# Altium PCB simple.PcbDoc (part 2 of 2)
Units mil, origin at the board's own origin, x right, y up, seen from the top; angles counter-clockwise.
Board outline 3675.59 x 3445.28 mil, 2 copper layers (Top Layer, Bottom Layer); 234 components, 188 nets, 815 pads, 280 vias.
Unrouted connection lines stored in the file: 1.
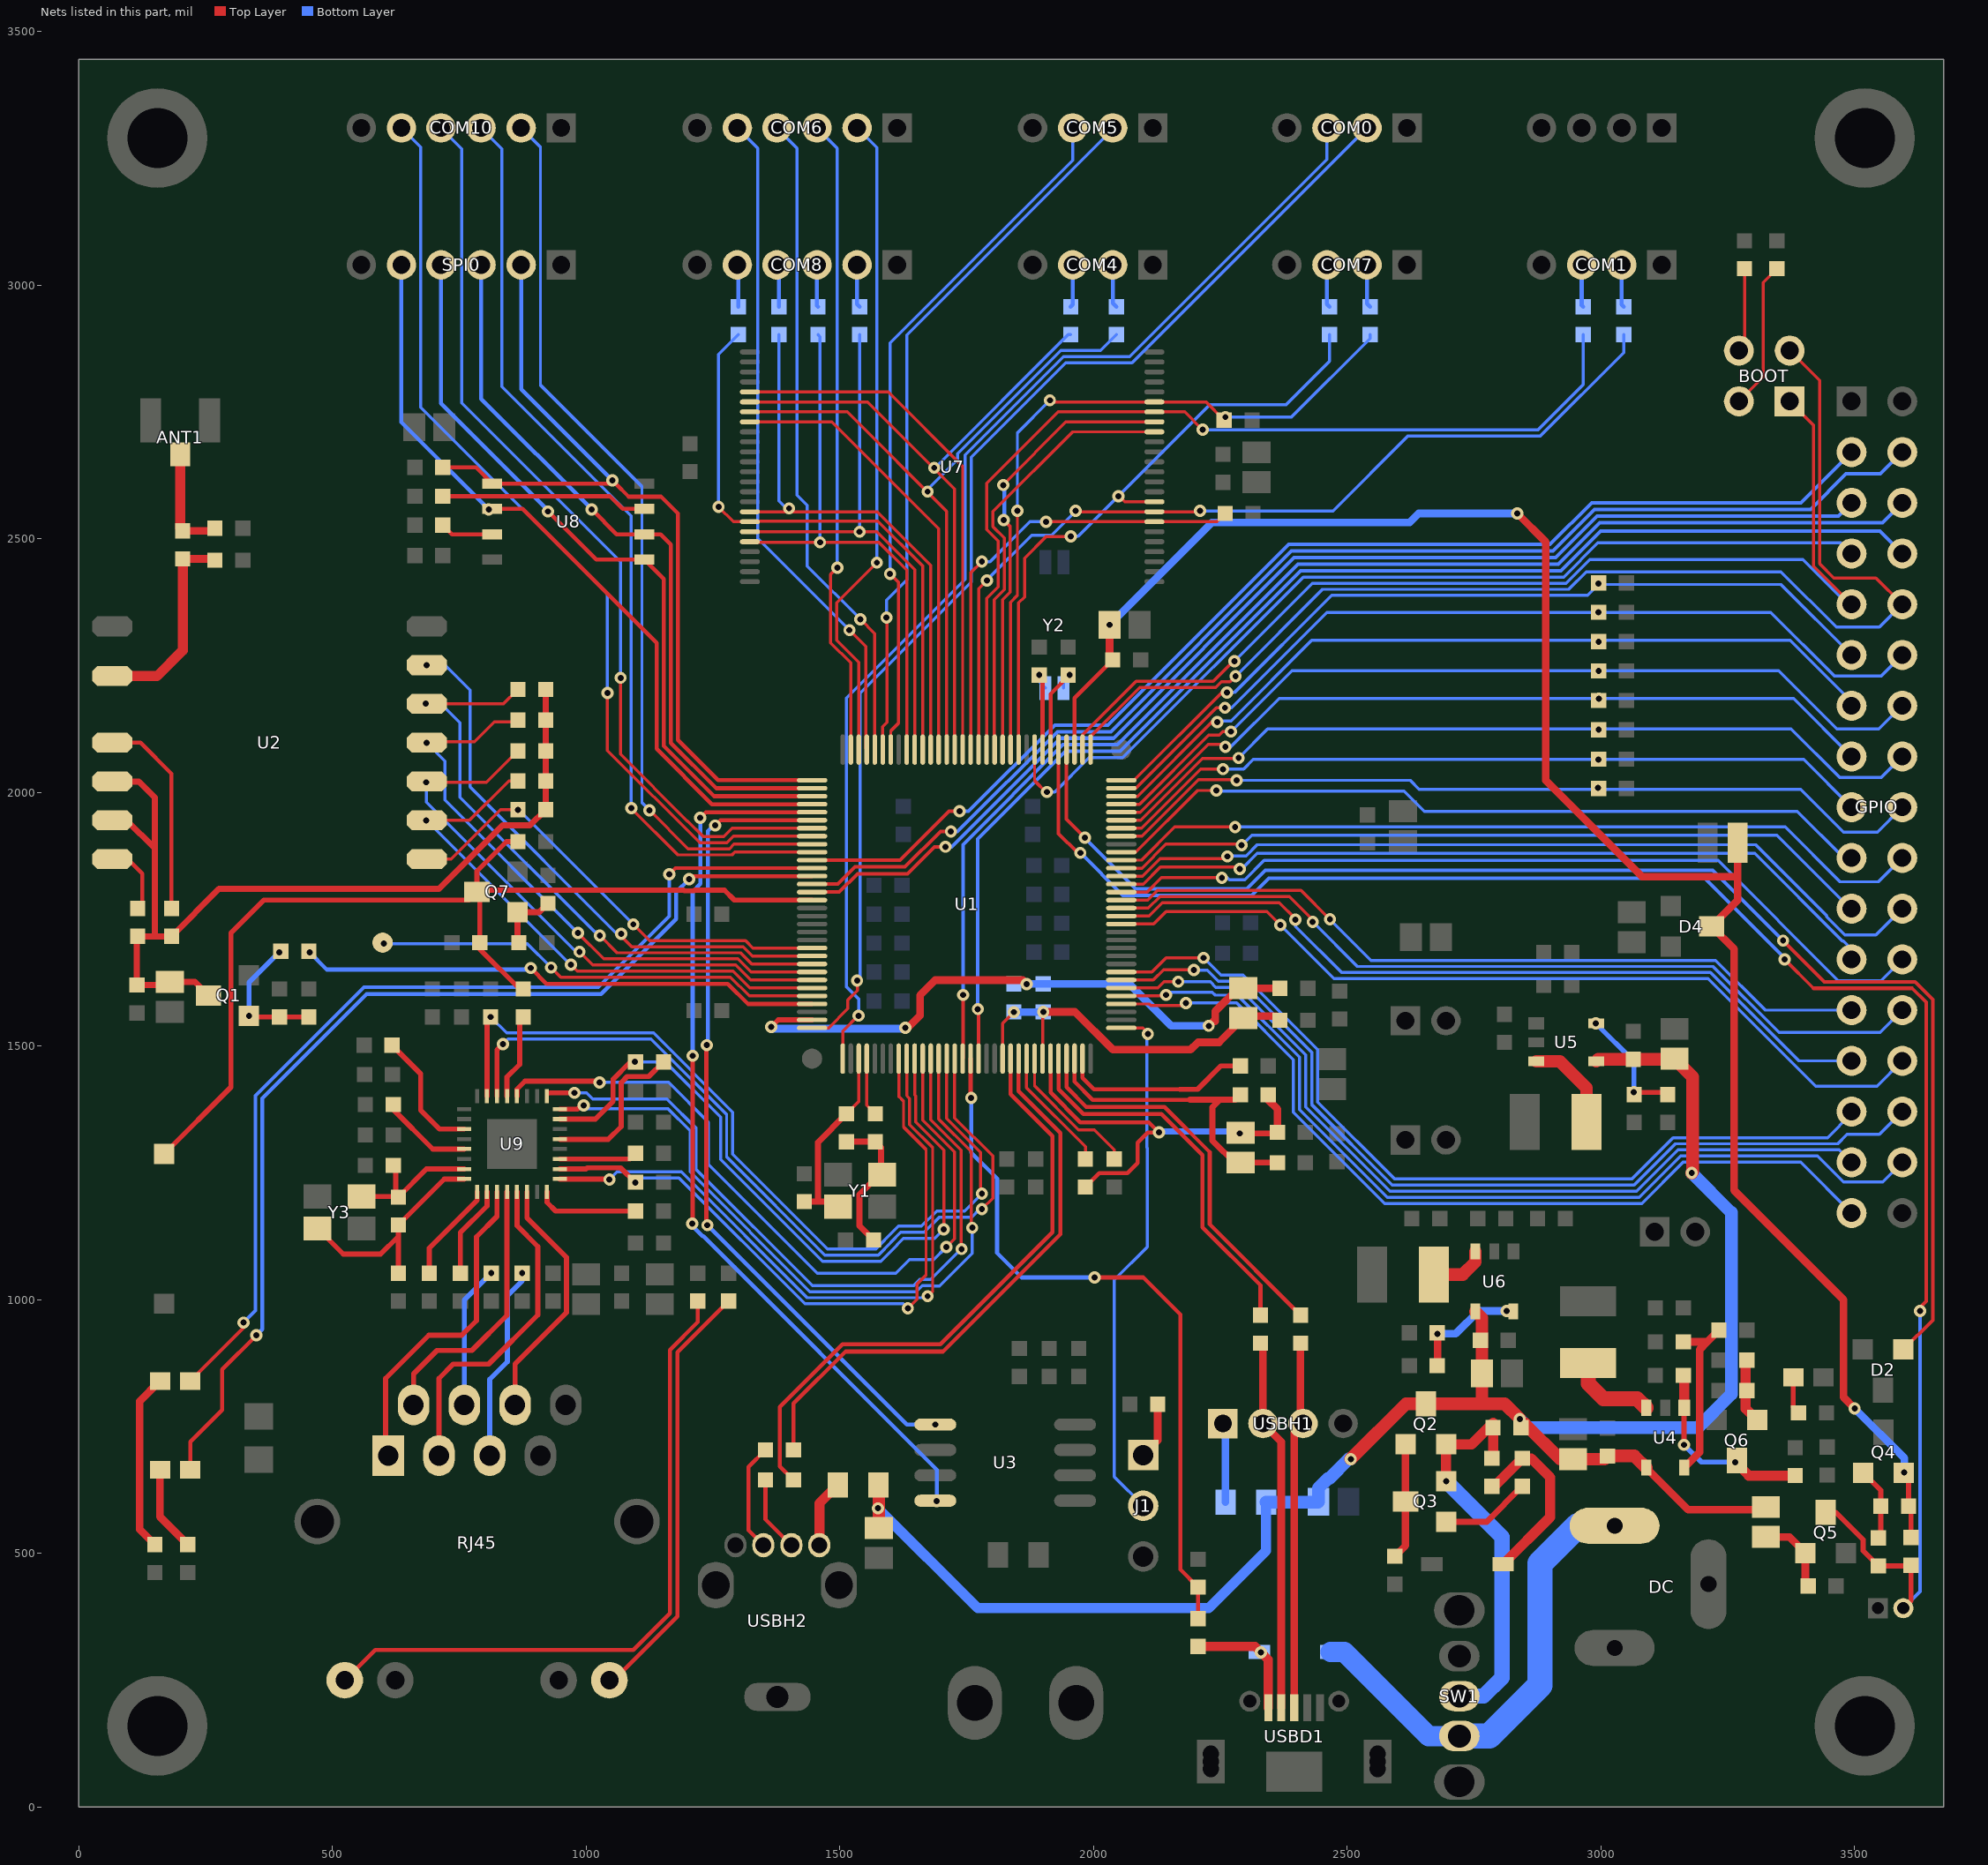
[diagram p2: the nets of this part, all layers, seen from the top]

## Via types
v1: diameter 24, hole 12, Top Layer to Bottom Layer, 232 vias
v2: diameter 25, hole 14, Top Layer to Bottom Layer, 48 vias

## Nets (pads, with @x,y where several pads share a name; then routed paths per layer and width w, separated by ;. In a path a pad name is that pad's centre, name@x,y a point inside that pad or via, vN(x,y) a via of type N, cw(c..) or ccw(c..) an arc to the next point about the centre after c; other vN are vias at no path point) (continued)
NetANT1_1: ANT1.1 C39.1 R18.1 | length 218.9
  Top Layer w15: R18.1@205,2515.5 263,2515.5 C39.1@268.5,2521
  Top Layer w20: ANT1.1@200,2666.53 200,2520.5 R18.1@205,2515.5
NetBOOT_2: BOOT.2 R51.1 | length 292.6
  Top Layer w6: BOOT.2@3272,2771 3320,2819 3320,3005.5 R51.1@3347,3032.5
NetBOOT_4: BOOT.4 R52.1 | length 166.1
  Top Layer w6: BOOT.4@3272,2871 3283,2882 R52.1@3283,3032.5
NetC2_2: C2.2 R1.2 R2.1 Y1.1 | length 287.9
  Top Layer w12: R1.2@1513,1311.5 R2.1@1570,1311.5 1581.33,1300.17 1581.33,1251.5 Y1.1@1584.82,1248.01 ; C2.2@1566.5,1118 1539,1145.5 1539,1207.35 1578.15,1246.5 Y1.1@1583.31,1246.5
NetC37_2: C37.2 Q1.G R5.1 R8.1 | length 269.7
  Top Layer w10: v1(335.68,1560) 338.18,1557.5 C37.2@453.68,1557.5 ; R8.1@397.75,1687.75 R8.1@398.5,1687
  Bottom Layer w10: v1(335.68,1560) 335.68,1625.68 v1(395,1685)
NetC38_1: C38.1 R18.2 U2.9 | length 409
  Top Layer w15: R18.2@200,2460.5 R18.2@200,2464.5 ; R18.2@205,2460.5 266,2460.5 C38.1@268.5,2458
  Top Layer w20: U2.9@66,2229.34 154.34,2229.34 205,2280 R18.2@205,2460.5
NetC42_2: C42.2 Q5.G R34.1 | length 158.3
  Top Layer w15: C42.2@3325,532.47 3371.53,532.47 Q5.G@3403,501 3403,441.5 R34.1@3408.5,436
NetC43_1: C43.1 Q6.B R36.2 | length 127.3
  Top Layer w20: C43.1@3285.5,881 3285.5,785.5 Q6.B@3308,763
NetC44_1: C44.1 Q7.B R41.1 | length 128.3
  Top Layer w12: C44.1@867.5,1704 865,1706.5 Q7.B@865,1764 907.5,1764 R41.1@925,1781.5
NetC64_2: C64.2 U9.29 | length 181.8
  Top Layer w10: C64.2@620,1385 620,1375 697.84,1297.16 U9.29@759.51,1297.16
NetC65_2: C65.2 U9.2 | length 181.9
  Top Layer w10: C65.2@752,1052.5 752,1132.2 804.79,1184.99 U9.2@804.79,1212.51
NetC66_2: C66.2 RJ45.4 | length 281.5
  Bottom Layer w10: RJ45.4@760,792.91 760,999.5 v1(813,1052.5)
NetC67_2: C67.2 RJ45.5 | length 386.1
  Bottom Layer w10: RJ45.5@810,692.91 810,843 845,878 845,1008 874,1037 v1(874,1052.5)
NetC68_1: C68.1 R90.2 U9.31 Y3.1 | length 287
  Top Layer w10: Y3.1@557.31,1203.5 R90.2@625,1203.5 ; C68.1@625,1265 R90.2@625,1203.5 ; U9.31@759.51,1257.79 685.29,1257.79 R90.2@630,1202.5 629,1203.5 R90.2@625,1203.5
NetC69_1: C69.1 R90.1 U9.32 Y3.3 | length 456.8
  Top Layer w10: Y3.3@470.69,1140.5 521.2,1090 595,1090 630,1125 ; C69.1@630,1052.5 630,1125 ; U9.32@759.51,1238.1 720.6,1238.1 R90.1@630,1147.5 630,1125
NetCK1_1: CK1.1 U4.3 | length 174
  Top Layer w30: CK1.1@2975,874.98 2975,835 3005,805 3071.31,805 U4.3@3089.2,787.11
NetCK2_1: CK2.1 U5.3 | length 187.7
  Top Layer w25: U5.3@2872.69,1470.13 2918.87,1470.13 2971.71,1417.29 CK2.1@2971.71,1350.53
NetCK3_1: CK3.1 U6.3 | length 112.2
  Top Layer w25: CK3.1@2671.02,1050 2728,1050 2752.6,1074.6 U6.3@2752.6,1095
NetD1_2: D1.2 R10.1 USBD1.1 | length 243.8
  Top Layer w18: R10.1@2206,316.5 2318.5,316.5 v1(2330,305) 2344.45,290.55 USBD1.1@2344.45,195.92
NetD3_1: D3.1 R28.1 R29.2 | length 362.7
  Top Layer w20: R28.1@2785,632.5 2790,632.5 R29.2@2845,687.5 2862.5,687.5 2900,650 2900,571.63 D3.1@2807.37,479
NetFS1_2: FS1.2 USBH1.1 | length 157.1
  Bottom Layer w15: USBH1.1@2255,756 2260,751 FS1.2@2260,601
NetFS2_2: FS2.2 USBH2.1 | length 133.7
  Top Layer w20: USBH2.1@1459.68,516.32 1459.68,598.68 FS2.2@1496,635
NetJ1_1: J1.1 R6.1 | length 111.8
  Top Layer w15: J1.1@2098,694 2126.5,722.5 R6.1@2126.5,794
NetNET_1: NET.1 R7.1 | length 170.2
  Top Layer w15: NET.1@160.08,665 160.08,572.42 R7.1@215,517.5
NetPW1_2: PW1.2 R44.2 | length 74.3
  Top Layer w10: PW1.2@3379.08,847 3379.08,787.42 R44.2@3389.5,777
NetQ2_G: Q2.G Q3.D R31.2 | length 229.2
  Top Layer w15: R31.2@2594,494.5 2615,515.5 Q3.D@2615,602.5 Q2.G@2615,715
NetQ2_S: Q2.S Q3.S R27.2 R28.2 SW1.2 | length 776.2
  Top Layer w20: v1(2695,642.5) Q2.S@2695,715 2745,715 R27.2@2787.5,757.5 ; R28.2@2785,687.5 2787.5,690 R27.2@2787.5,748
  Bottom Layer w30: v1(2695,642.5) 2805,532.5 2805,255 2768.8,218.8 SW1.2@2721,218.8
NetQ3_G: Q3.G R29.1 | length 179
  Top Layer w12: Q3.G@2695,562.5 2775,562.5 R29.1@2845,632.5
NetQ4_B: Q4.B R32.2 R35.2 | length 144.7
  Top Layer w10: Q4.B@3517,659 3551.5,624.5 R32.2@3551.5,593 3551.5,535 R35.2@3547,530.5
NetQ6_C: Q6.C R37.1 R43.2 U4.1 | length 381.7
  Top Layer w10: v1(3164,714) U4.1@3164,787.11
  Top Layer w20: R43.2@3162.5,851 3164,849.5 U4.1@3164,787.11 ; v1(3265,680) 3291.5,653.5 R37.1@3383,653.5
  Bottom Layer w10: v1(3164,714) 3198,680 v1(3265,680)
NetR3_1: R3.1 U1.127 | length 377.3
  Top Layer w8: U1.127@1978.35,1475.35 1978.35,1437.65 2001,1415 2170,1415
  Top Layer w10: 2170,1415 2205,1415 2251,1461 R3.1@2289.5,1461
NetR4_1: R4.1 U1.121 | length 281.3
  Top Layer w6: U1.121@1883.86,1475.35 1883.86,1421.76 1970.62,1335 2002,1335 2041,1296 R4.1@2041,1277.5
NetR11_2: R11.2 U2.13 | length 143.1
  Top Layer w8: U2.13@66,1868.73 96.27,1868.73 125,1840 125,1780.5 R11.2@116,1771.5
NetR14_2: R14.2 U2.10 | length 407.8
  Top Layer w8: U2.10@66,2098.09 121.91,2098.09 183,2037 R14.2@183,1771.5
NetR21_1: R21.1 USBH2.2 | length 153.3
  Top Layer w8: R21.1@1353.5,645 1353.5,567.38 USBH2.2@1404.56,516.32 USBH2.2@1407,518.76
NetR22_1: R22.1 USBH2.3 | length 213.7
  Top Layer w8: USBH2.3@1349.44,516.32 1320,545.76 1320,670.5 R22.1@1353.5,704
NetR42_2: R42.2 R45.1 U4.5 | length 346.4
  Top Layer w15: R42.2@3162.5,917 3209.5,917 ; U4.5@3164,669 3194.5,699.5 3194.5,902 3209.5,917 ; R45.1@3232.5,940 3209.5,917
NetR46_1: R46.1 R47.2 U5.5 | length 235.6
  Top Layer w10: v1(3065,1409) 3127.21,1409 R47.2@3131.69,1404.53
  Bottom Layer w10: v1(2990,1545) 3065,1470 v1(3065,1409)
NetR48_1: R48.1 R49.2 U6.5 | length 231.7
  Top Layer w15: R49.2@2677.5,870 2678,870.5 v1(2678,933) ; v1(2814,978) 2826.29,978 U6.5@2827.4,976.89
  Bottom Layer w15: v1(2678,933) 2714,933 2759,978 v1(2814,978)
NetR82_1: R82.1 SYS.1 | length 351.5
  Top Layer w15: R82.1@150,517.5 120,547.5 120,799.92 SYS.1@160.08,840
NetR85_2: R85.2 RJ45.9 | length 1333.6
  Top Layer w8: RJ45.9@524.37,250 584.37,310 1093,310 1165,382 1165,901.3 1220,956.3 R85.2@1220,997.5
NetR86_2: R86.2 RJ45.12 | length 849.5
  Top Layer w8: RJ45.12@1046,250 1054,250 1180,376 1180,896.5 R86.2@1281,997.5
NetR87_2: R87.2 U9.13 | length 318.5
  Top Layer w10: U9.13@948.49,1316.84 949.33,1316 1043.53,1316 1069,1341.47 1069,1428.06 1080.94,1440 1123.5,1440 R87.2@1152.5,1469
NetR88_1: R88.1 U9.27 | length 252.7
  Top Layer w10: R88.1@617.5,1502 674,1445.5 674,1373.53 711,1336.53 U9.27@759.51,1336.53
NetR91_2: R91.2 U9.1 | length 199
  Top Layer w10: R91.2@691,1052.5 691,1102 785.1,1196.1 U9.1@785.1,1212.51
NRST: C45.2 Q7.C R38.2 R89.1 RESET.2 U1.80 | length 2048.8
  Top Layer w10: RESET.2@168.3,1287.39 300,1419.1 300,1723 365,1788 769,1788 Q7.C@785,1804 Q7.C@785,1807.5 ; Q7.C@786,1803 790.5,1798.5 R38.2@790.5,1704 790.5,1691 R89.1@869,1612.5 ; C45.2@865.5,1903 843,1903 785,1845 Q7.C@785,1807.5 ; U1.80@1445.35,1787.87 1292.13,1787.87 1272.5,1807.5 1214.03,1807.5 1212.53,1806 1193.47,1806 1191.97,1807.5 Q7.C@785,1807.5
PA0: BOOT.1 GPIO.9 U1.34 | length 2174.6
  Top Layer w6: U1.34@1978.35,2084.65 1978.35,2113.49 2083.86,2219 2236.03,2219 2276.03,2259 v1(2278,2259) ; BOOT.1@3372,2771 3419,2724 3419,2446 GPIO.9@3494,2371
  Bottom Layer w6: v1(2278,2259) 2431.5,2412.5 2931.53,2412.5 2978.03,2459 3398,2459 3486,2371 GPIO.9@3494,2371
PA1: BOOT.3 GPIO.10 U1.33 | length 2464.3
  Top Layer w6: U1.33@1994.11,2084.66 1994.11,2110.08 2091,2207 2241,2207 2252,2218 2269,2218 v1(2280,2229) ; BOOT.3@3372,2871 3431,2812 3431,2450.97 3458.97,2423 3542,2423 GPIO.10@3594,2371
  Bottom Layer w6: v1(2280,2229) 2451.5,2400.5 2936.5,2400.5 2971,2435 3355,2435 3464,2326 3549,2326 GPIO.10@3594,2371
PA2: GPIO.11 R53.1 U1.32 | length 1658
  Top Layer w6: U1.32@2054.65,2024.09 2080.09,2024.09 2253,2197 v1(2263,2197) ; v1(2995,2412) 2995,2412.5 R53.1@2995.5,2413
  Bottom Layer w6: v1(2263,2197) 2277.7,2197 2469.2,2388.5 2973.5,2388.5 2995,2410 3355,2410 GPIO.11@3494,2271
PA3: GPIO.12 R54.1 U1.31 | length 1752.3
  Top Layer w6: U1.31@2054.65,2008.35 2083.49,2008.35 2242.14,2167 v1(2259,2167) ; v1(2995.14,2355.14) R54.1@2995.5,2355.14
  Bottom Layer w6: v1(2259,2167) 2272,2167 2460,2355 v1@2995,2355 ; v1(2995.14,2355.14) v1@2995,2355 ; GPIO.12@3594,2271 3553,2230 3460,2230 3335,2355 v1@2995,2355
PA4: GPIO.13 R55.1 U1.30 | length 1618.1
  Top Layer w6: U1.30@2054.65,1992.6 2086.6,1992.6 v1@2236,2142
  Bottom Layer w6: v1(2244,2139) 2246,2141 2271,2141 2430,2300 3373.03,2300 3494,2179.03 GPIO.13@3494,2171
  other v1: 2995.5,2297.29
PA5: GPIO.14 R56.1 U1.29 | length 1715
  Top Layer w6: U1.29@2054.65,1976.85 2090.85,1976.85 2227,2113 2247.7,2113 2254.7,2120 v1(2271,2120)
  Bottom Layer w6: v1(2271,2120) 2391,2240 3350,2240 3465,2125 3548,2125 GPIO.14@3594,2171
  other v1: 2995.5,2239.43
PA6: GPIO.15 R57.1 U1.28 | length 1586.4
  Top Layer w6: U1.28@2054.65,1961.1 2092.07,1961.1 2225.97,2095 2260,2095 v1(2260,2090)
  Bottom Layer w6: v1(2260,2090) 2270.7,2090 2365.7,2185 v1(2996,2185) 3380,2185 GPIO.15@3494,2071
PA7: GPIO.16 R58.1 U1.27 | length 1670.1
  Top Layer w6: U1.27@2054.65,1945.35 2093.3,1945.35 2214.94,2067 2285,2067 v1(2286,2068)
  Bottom Layer w6: v1(2286,2068) 2343,2125 3375,2125 3470,2030 3553,2030 GPIO.16@3594,2071
  other v1: 2995.5,2123.71
PA8: GPIO.17 R59.1 U1.26 | length 1534.4
  Top Layer w6: U1.26@2054.65,1929.61 2094.52,1929.61 2210.91,2046 v1(2255,2046)
  Bottom Layer w6: v1(2255,2046) 2296,2046 2315,2065 v1(2995,2065) 3400,2065 GPIO.17@3494,1971
PA9: GPIO.18 R60.1 U1.25 | length 1649.8
  Top Layer w6: U1.25@2054.65,1913.86 2095.74,1913.86 2206.88,2025 2281,2025 v1(2282,2024) ; v1(2994.5,2009) R60.1@2995.5,2008
  Bottom Layer w6: v1(2282,2024) 2624,2024 2642,2006 3394,2006 3478,1922 3545,1922 GPIO.18@3594,1971
PA10: GPIO.19 U1.23 | length 1544.8
  Top Layer w6: U1.23@2054.65,1882.36 2083.49,1882.36 2205.13,2004 v1(2242,2004)
  Bottom Layer w6: v1(2242,2004) 2243,2003 2612,2003 2652,1963 3387,1963 3479,1871 GPIO.19@3494,1871
PA11: GPIO.20 U1.22 | length 1630.6
  Top Layer w6: U1.22@2054.65,1866.61 2094.38,1866.61 2159.76,1932 v1(2279,1932)
  Bottom Layer w6: v1(2279,1932) 3363,1932 3471,1824 3547,1824 GPIO.20@3594,1871
PA12: GPIO.21 U1.21 | length 1529
  Top Layer w6: U1.21@2054.65,1850.87 2095.6,1850.87 2142.87,1898.13 2289.87,1898.13 v1(2292,1896)
  Bottom Layer w6: v1(2292,1896) 2312,1916 3347,1916 3493,1770 GPIO.21@3494,1771
PA13: GPIO.22 U1.20 | length 1661.4
  Top Layer w6: U1.20@2054.65,1835.12 2096.82,1835.12 2131.35,1869.65 2259.65,1869.65 v1(2264,1874)
  Bottom Layer w6: v1(2264,1874) 2265,1875 2300.7,1875 2322.7,1897 3304.97,1897 3445,1756.97 3445,1755 3481,1719 3542,1719 GPIO.22@3594,1771
PA14: GPIO.23 U1.19 | length 1566.1
  Top Layer w6: U1.19@2054.65,1819.37 2098.05,1819.37 2131.68,1853 2284,1853 v1(2288,1849)
  Bottom Layer w6: v1(2288,1849) 2291.67,1849 2322.67,1880 3303.03,1880 3476.03,1707 3478,1707 3494,1691 GPIO.23@3494,1671
PA15: GPIO.24 U1.18 | length 1685.7
  Top Layer w6: U1.18@2054.65,1803.62 2105.62,1803.62 2134,1832 v1(2253,1832)
  Bottom Layer w6: v1(2253,1832) 2260,1832 2262,1834 2268,1828 2298,1828 2336,1866 3231,1866 3468,1629 3552,1629 GPIO.24@3594,1671
PB0: COM5.3 U1.58 | length 1388
  Top Layer w6: v1(1599,2431) 1616,2414 1616,2137 1600.39,2121.39 U1.58@1600.39,2084.65
  Bottom Layer w6: v1(1599,2431) 1599,2886 1959,3246 COM5.3@1959,3310
PB1: COM5.2 U1.59 | length 1414
  Top Layer w6: U1.59@1584.65,2084.65 1584.65,2129.65 1593,2138 1593,2344 v1(1592,2345)
  Bottom Layer w6: v1(1592,2345) 1592,2379 1632,2419 1632,2902 2038,3308 COM5.2@2038,3310
PB2: COM6.4 U1.60 | length 1305.3
  Top Layer w6: v1(1540.5,2341.5) 1568.9,2313.1 U1.60@1568.9,2084.65
  Bottom Layer w6: COM6.4@1376,3310 1416,3270 1416,2586 1436,2566 1436,2446 v1(1540.5,2341.5)
PB3: COM6.5 U1.61 | length 1331
  Top Layer w6: v1(1519,2320) 1551,2288 1551,2086.8 U1.61@1553.15,2084.65
  Bottom Layer w6: COM6.5@1298,3310 1338,3270 1338,2501 v1(1519,2320)
PB4: COM6.2 U1.62 | length 1292.2
  Top Layer w6: U1.62@1537.4,2084.65 1537.4,2256.6 1494,2300 1494,2374 v1(1573,2453)
  Bottom Layer w6: COM6.2@1534,3310 1573,3271 v1(1573,2453)
PB5: COM6.3 U1.63 | length 1263.7
  Top Layer w6: v1(1495,2443) 1482,2430 1482,2295.03 1521.65,2255.38 U1.63@1521.65,2084.65
  Bottom Layer w6: COM6.3@1455,3310 1495,3270 v1(1495,2443)
PB6: R68.1 SPI0.2 U1.65 U8.1 | length 1744.6
  Top Layer w8: R68.1@717.5,2641 783,2641 U8.1@815,2609 1058,2609 1084,2583 1148,2583 1181,2550 1181,2103.4 1260.3,2024.09 U1.65@1445.35,2024.09
  Bottom Layer w8: SPI0.2@872,3040 872,2795 v1(1052,2615)
PB7: SPI0.3 U1.66 U8.6 | length 1463.6
  Top Layer w8: v1(1011,2558) 1060,2509 U8.6@1115,2509 1147,2509 1167,2489 1167,2097.6 1256.25,2008.35 U1.66@1445.35,2008.35
  Bottom Layer w8: SPI0.3@793,3040 793,2776 v1(1011,2558)
PB8: SPI0.4 U1.67 U8.5 | length 1518.5
  Top Layer w8: v1(925,2554) 1020,2459 U8.5@1115,2459 1153,2421 1153,2091.8 1252.2,1992.6 U1.67@1445.35,1992.6
  Bottom Layer w8: SPI0.4@714,3040 714,2767.2 v1@926.1,2555.1
PB9: SPI0.5 U1.68 U8.2 | length 1554.6
  Top Layer w8: v1(808,2558) 814,2558 U8.2@815,2559 875,2559 1139,2295 1139,2086 1248.15,1976.85 U1.68@1445.35,1976.85
  Bottom Layer w8: SPI0.5@636,3040 636,2730 v1(808,2558)
PB10: U1.69 U3.4 | length 1773.9
  Top Layer w8: v1(1209,1150) 1210,1151 v1@1210,1476 ; v1(1225,1950) 1236.1,1961.1 U1.69@1445.35,1961.1
  Bottom Layer w8: v1(1209,1150) 1209,1145.89 1229.89,1125 1231,1125 1691,665 v1(1691,603) ; v1(1210,1481) 1210,1804.89 1225,1819.89 v1(1225,1950)
PB11: U1.70 U3.1 | length 1604.8
  Top Layer w8: v1@1237,1502 1237,1149 v1(1239,1147) ; v1(1254.5,1935) 1264.85,1945.35 U1.70@1445.35,1945.35
  Bottom Layer w8: v1(1238,1502) 1240,1504 1240,1924 1251,1935 v1(1254.5,1935) ; v1(1239,1147) 1632,754 v1(1688.2,754)
PB12: COM10.4 U1.71 | length 1832.7
  Top Layer w6: v1(1068,2226) 1068,2075.38 1199.5,1943.89 1200,1943.89 1230.89,1913 1271.11,1913 1287.72,1929.61 U1.71@1445.35,1929.61
  Bottom Layer w6: COM10.4@714,3310 755,3269 755,2768 1068,2455 v1(1068,2226)
PB13: COM10.5 U1.72 | length 1879.2
  Top Layer w6: v1(1042,2196) 1042,2083 1224,1901 1277.5,1901 1290.36,1913.86 U1.72@1445.35,1913.86
  Bottom Layer w6: COM10.5@636,3310 674,3272 674,2759 1042,2391 v1(1042,2196)
PB14: COM10.2 U1.73 | length 1805.4
  Top Layer w6: v1(1125,1965) 1201,1889 1282.47,1889 1291.58,1898.11 U1.73@1445.35,1898.11
  Bottom Layer w6: COM10.2@872,3310 910,3272 910,2803 1110,2603 1110,1980 v1(1125,1965)
PB15: COM10.3 U1.74 | length 1860.3
  Top Layer w6: v1(1089,1969) 1181,1877 1287.44,1877 1292.8,1882.36 U1.74@1445.35,1882.36
  Bottom Layer w6: COM10.3@793,3310 834,3269 834,2800 1089,2545 v1(1089,1969)
PD0: R20.1 U1.86 U2.1 | length 912.6
  Top Layer w6: U2.1@686,1868.73 733.73,1868.73 831,1966 v1(865.5,1966) ; v1(1093,1740) 1125,1708 1314.36,1708 1328.97,1693.39 U1.86@1445.35,1693.39
  Bottom Layer w6: v1(865.5,1966) 867,1966 v1(1093,1740)
PD1: U1.87 U2.6 | length 1121.5
  Top Layer w6: v1(1069,1721.57) 1069,1717 1090,1696 1309.39,1696 1327.75,1677.64 U1.87@1445.35,1677.64
  Bottom Layer w6: v1(686,2251) 687,2252 721,2252 771,2202 771,2011 1066,1716 1070,1716 1069,1717 v1(1069,1721.57)
PD2: R12.1 U1.88 U2.5 | length 1251.3
  Top Layer w6: U2.5@686,2174.55 837.05,2174.55 R12.1@865.5,2203 ; v1(1027,1718) 1061,1684 1304.42,1684 1326.53,1661.89 U1.88@1445.35,1661.89
  Bottom Layer w6: v1(684,2175) 714,2175 751.49,2137.51 751.49,1990.49 1016.97,1725 1020,1725 v1(1027,1718)
PD3: R13.1 U1.89 U2.4 | length 1189.6
  Top Layer w6: v1(686,2098.09) 687.91,2100 780,2100 819.26,2139.26 862.26,2139.26 R13.1@865.5,2142.5 ; v1(984,1723) 1035,1672 1299.45,1672 1325.3,1646.14 U1.89@1445.35,1646.14
  Bottom Layer w6: v1(686,2098.09) 722,2062.09 722,1985 v1(984,1723)
PD4: R15.1 U1.90 U2.3 | length 1150.8
  Top Layer w6: v1(685,2020) 803.5,2020 R15.1@865.5,2082 ; v1(987,1686) 1013,1660 1294.48,1660 1324.08,1630.39 U1.90@1445.35,1630.39
  Bottom Layer w6: v1(685,2020) 685,1981 980,1686 v1(987,1686)
PD5: R17.1 U1.91 U2.2 | length 1109.6
  Top Layer w6: v1(685,1945) 770,1945 847.5,2022.5 R17.1@865.5,2022.5 ; v1(970,1660.57) 982.57,1648 1289.5,1648 1322.86,1614.65 U1.91@1445.35,1614.65
  Bottom Layer w6: v1(685,1945) v1@969.71,1660.29
PD6: PD6.1 U1.92 | length 887.1
  Top Layer w6: v1(931,1655) 950,1636 1284.53,1636 1321.64,1598.9 U1.92@1445.35,1598.9
  Bottom Layer w6: v1(601,1702) 884,1702 v1(931,1655)
PD7: R8.2 U1.93 | length 1035.3
  Top Layer w8: R8.2@453.5,1687 R8.2@455,1687 ; v1(891,1654) 922,1623 1279.15,1623 1319,1583.15 U1.93@1445.35,1583.15
  Bottom Layer w8: v1(455,1685) 489,1651 v1@891,1651
PE0: COM0.3 U1.97 | length 2331
  Top Layer w6: U1.97@1505.91,1475.35 1505.91,1529.91 v1@1537,1561 ; v1(1537,1560) v1@1537,1561 ; v1@1539,1563 v1@1537,1561
  Bottom Layer w6: v1(1537,1560) 1537,1593 1513,1617 1513,2185.97 1747,2419.97 1747,2665.53 1940.51,2859.04 2071.07,2859.04 2460,3247.97 COM0.3@2460,3310
PE1: COM0.2 U1.96 | length 2323.5
  Top Layer w6: U1.96@1445.35,1535.91 1477.91,1535.91 1516,1574 1516,1591 1535,1610 1535,1628 v1(1534,1629)
  Bottom Layer w6: v1(1534,1629) 1540,1635 1540,2196 1759,2415 1759,2660.56 1945.49,2847.04 2076.04,2847.04 COM0.2@2539,3310
PF0: U1.111 U9.22 | length 1655
  Top Layer w6: U1.111@1726.38,1475.35 1726.38,1358.62 1801.37,1283.63 1801.37,1200.37 v1(1780,1179)
  Top Layer w10: U9.22@824.47,1401.49 824.47,1492.47 v1(836,1504)
  Bottom Layer w6: v1(836,1504) 846,1514 1128.03,1514 1277,1365.03 1277,1281.76 1470.76,1088 1576.03,1088 1601,1112.97 1601,1113.67 1620.33,1133 1666,1133 1696,1163 1760,1163 1776,1179 v1(1780,1179)
PF1: R83.1 U1.110 U9.23 | length 1711.4
  Top Layer w6: U1.110@1710.63,1475.35 1710.63,1357.4 1777.38,1290.65 1777.38,1206.38 v1(1780,1209)
  Top Layer w10: U9.23@804.79,1401.49 804.79,1550.62 v1(811.67,1557.5)
  Bottom Layer w6: v1(811.67,1557.5) 843.17,1526 1133,1526 1289,1370 1289,1286.73 1475.73,1100 1571.06,1100 1589,1117.94 1589,1118.64 1615.36,1145 1661.03,1145 1691.03,1175 1746,1175 v1(1780,1209)
PF2: U1.109 U9.16 | length 1464.5
  Top Layer w6: U1.109@1694.88,1475.35 1694.88,1356.18 1758.79,1292.27 1758.79,1139.79 v1(1761,1142)
  Top Layer w10: U9.16@948.49,1375.9 982.9,1375.9 992,1385 994,1383 v1(995,1383)
  Bottom Layer w6: v1(995,1383) 1001,1377 1161.03,1377 1205,1333.03 1205,1251.94 1440.94,1016 1650.67,1016 1662.67,1028 1681.7,1028 1682.7,1027 1696.7,1027 1761,1091.3 v1(1761,1142)
PF3: U1.108 U9.17 | length 1469
  Top Layer w6: U9.17@922.9,1401.49 929.41,1408 ; U1.108@1679.13,1475.35 1679.13,1354.95 1739,1295.09 1739,1098 1740,1099 v1(1740,1100)
  Top Layer w10: 929.41,1408 v1(977,1408)
  Bottom Layer w6: v1(977,1408) 1000.57,1408 1012.95,1395.62 1159.38,1395.62 1217,1338 1217,1256.91 1445.91,1028 1645.7,1028 1657.7,1040 1679,1040 v1@1740,1101 ; v1(1740,1100) v1@1740,1101 ; v1@1746,1107 v1@1740,1101
PF4: U1.107 U9.20 | length 1497.6
  Top Layer w6: U1.107@1663.39,1475.35 1663.39,1353.73 1726,1291.12 1726,1120 v1(1710,1104)
  Top Layer w10: U9.20@863.84,1401.49 863.84,1415.08 879.77,1431 1024.23,1431 v1(1026.62,1428.62)
  Bottom Layer w6: v1(1026.62,1428.62) 1162.5,1428.62 1241,1350.12 1241,1266.85 1455.85,1052 1610.3,1052 1637.3,1079 1685,1079 v1(1710,1104)
PF5: R87.1 U1.106 U9.15 | length 1426.9
  Top Layer w6: U1.106@1647.64,1475.35 1647.64,1403.56 1649.66,1401.54 1649.66,1350.49 1705,1295.15 v1(1705,1139)
  Top Layer w10: U9.15@948.49,1356.21 1018.1,1356.21 1053,1391.11 1053,1434.68 1087.32,1469 v1(1096,1469)
  Bottom Layer w6: v1(1096,1469) 1156.06,1469 1265,1360.06 1265,1276.79 1465.79,1076 1581,1076 1613,1108 1613,1108.7 1625.3,1121 1687,1121 v1(1705,1139)
PF6: U1.105 U9.9 | length 1328.8
  Top Layer w6: U1.105@1631.89,1475.35 1631.89,1402.49 1634,1400.38 1634,1400.22 1637.66,1396.57 1637.66,1345.52 1683,1300.18 1683,1017 v1(1673,1007)
  Top Layer w10: U9.9@948.49,1238.1 1044.9,1238.1 v1(1046,1237)
  Bottom Layer w6: v1(1046,1237) 1061,1252 1187.97,1252 1435.97,1004 1670,1004 v1(1673,1007)
PF7: R78.1 U1.104 U9.10 | length 1338.2
  Top Layer w6: U1.104@1616.14,1475.35 1616.14,1401.27 1622,1395.41 1622,1395.25 1625.66,1391.6 1625.66,1340.55 1670,1296.21 1670,1049 1652,1031 1652,1001 v1(1634,983)
  Top Layer w10: U9.10@948.49,1257.79 999.79,1257.79 1002,1260 1068,1260 v1(1097,1231)
  Bottom Layer w6: v1(1097,1231) 1106,1240 1183,1240 1431,992 1625,992 v1(1634,983)
PF10: GPIO.8 U1.114 | length 2524.9
  Top Layer w7: v1(1772,1573) 1773.62,1571.38 U1.114@1773.62,1475.35
  Bottom Layer w7: v1(1772,1573) 1772,1907.93 1945.07,2081 2052.31,2081 2408.31,2437 2921.38,2437 2999.38,2515 3550,2515 GPIO.8@3594,2471
PG6: GPIO.25 U1.17 | length 1545
  Top Layer w6: U1.17@2054.65,1787.87 2106.84,1787.87 2125.97,1807 2409,1807 v1(2466,1750)
  Bottom Layer w6: v1(2466,1750) 2547,1669 3225.91,1669 3323.91,1571 GPIO.25@3494,1571
PG7: GPIO.26 U1.16 | length 1680.4
  Top Layer w6: U1.16@2054.65,1772.13 2108.07,1772.13 2130.94,1795 2386,1795 2432,1749 v1(2432,1745)
  Bottom Layer w6: v1(2432,1745) 2520,1657 3220.94,1657 3350.94,1527 3550,1527 GPIO.26@3594,1571
PG8: GPIO.27 U1.15 | length 1588.4
  Top Layer w6: U1.15@2054.65,1756.38 2109.29,1756.38 2135.91,1783 2366,1783 2398,1751 v1(2398,1749)
  Bottom Layer w6: v1(2398,1749) 2398,1736 2489,1645 3215.97,1645 3389.97,1471 GPIO.27@3494,1471
PG9: GPIO.28 U1.14 | length 1712.6
  Top Layer w6: U1.14@2054.65,1740.63 2118.63,1740.63 2143,1765 2342,1765 v1(2368,1739)
  Bottom Layer w6: v1(2368,1739) 2474,1633 3211,1633 3423,1421 3544,1421 GPIO.28@3594,1471
PG10: GPIO.29 U1.8 | length 1749.3
  Top Layer w6: U1.8@2054.65,1646.14 2115.14,1646.14 2143,1674 v1(2217,1674)
  Bottom Layer w6: v1(2217,1674) 2251,1640 2295,1640 2442,1493 2442,1389.88 2593.88,1238 3060.62,1238 3142.12,1319.5 3446.5,1319.5 3494,1367 GPIO.29@3494,1371
PG11: GPIO.30 U1.7 | length 1844.1
  Top Layer w6: U1.7@2054.65,1630.39 2117.75,1630.39 2138,1650.65 2197.35,1650.65 v1(2198,1650)
  Bottom Layer w6: v1(2198,1650) 2224.03,1650 2246.03,1628 2290.03,1628 2430,1488.03 2430,1384.91 2588.91,1226 3065.59,1226 3147.09,1307.5 3466.5,1307.5 3485,1326 3549,1326 GPIO.30@3594,1371
PG12: GPIO.31 U1.6 | length 1719.9
  Top Layer w6: U1.6@2054.65,1614.65 2126.95,1614.65 2139.3,1627 v1(2167,1627)
  Bottom Layer w6: v1(2167,1627) 2230.06,1627 2241.06,1616 2285.06,1616 2418,1483.06 2418,1379.94 2583.94,1214 3070.56,1214 3152.06,1295.5 3469.5,1295.5 GPIO.31@3494,1271
PG13: GPIO.32 U1.5 | length 1843.7
  Top Layer w6: U1.5@2054.65,1598.9 2140.9,1598.9 v1(2143,1601)
  Bottom Layer w6: v1@2141,1599 v1(2143,1601) 2148,1606 2234.09,1606 2239.59,1600.5 2283.59,1600.5 2406,1478.09 2406,1374.97 2578.97,1202 3075.53,1202 3157.03,1283.5 3427.01,1283.5 3478.04,1232.47 3555.47,1232.47 GPIO.32@3594,1271
PG14: GPIO.33 U1.4 | length 1742.1
  Top Layer w6: U1.4@2054.65,1583.15 2109.85,1583.15 2113,1580 2177,1580 v1(2182,1585)
  Bottom Layer w6: v1(2182,1585) 2282.12,1585 2394,1473.12 2394,1370 2574,1190 3080.5,1190 3162,1271.5 3393.5,1271.5 GPIO.33@3494,1171
PH0: R9.2 R10.2 U1.113 | length 1430.1
  Top Layer w8: U1.113@1757.87,1475.35 1757.87,1399.13 v1(1759,1398) ; v1(2002,1044) 2098,1044 2171,971 2171,468.5 R9.2@2206,433.5 R10.2@2206,371.5
  Bottom Layer w8: v1(1759,1398) 1759,1290 1810,1239 1810,1092 1858,1044 v1(2002,1044)
PH1: GPIO.6 U1.112 | length 2556.1
  Top Layer w7: v1@1740.38,1598.38 v1(1743,1601) 1743,1476.23 U1.112@1742.13,1475.35
  Bottom Layer w7: v1(1743,1601) 1743,1897.32 1939.68,2094 2046.92,2094 2402.92,2450 2916,2450 2997.97,2531.97 3554.97,2531.97 GPIO.6@3594,2571
PH7: GPIO.7 U1.40 | length 1895.7
  Top Layer w6: U1.40@1883.86,2084.65 1883.86,2023.14 1908,1999 v1(1908,2001)
  Bottom Layer w6: v1(1908,2001) 1923.85,2001 1991.35,2068.5 2057.49,2068.5 2413.49,2424.5 2926.56,2424.5 2994.06,2492 3473,2492 GPIO.7@3494,2471
PI1: R61.1 U1.42 U7.9 | length 1271.3
  Top Layer w6: U1.42@1852.36,2084.65 1852.36,2373.78 1864,2385.42 1864,2462 1906,2504 1954,2504 v1(1955,2505) ; v1@2050,2585 2061.94,2573.06 U7.9@2120,2573.06
  Bottom Layer w6: v1(1955,2505) 1970,2505 v1(2049,2584) 2229,2764 2379,2764 2465,2850 R61.1@2465,2902.5
PI2: R62.1 R64.2 U1.43 U7.19 | length 1442.6
  Top Layer w6: U1.43@1836.61,2084.65 1836.61,2375 1850,2388.39 v1(1850,2555) ; v1@1914,2769.91 U7.19@2120,2769.91 2220,2769.91 ; 2220,2770 2221.5,2770 R64.2@2257.5,2734 2257.5,2737.5 v1(2260,2740)
  Bottom Layer w6: v1(1850,2555) 1850,2709 v1(1914,2773) ; v1(2260,2740) 2390,2740 2545,2895 R62.1@2545,2902.5
PI3: U1.44 U7.17 | length 887.3
  Top Layer w6: U1.44@1820.87,2084.65 1820.87,2380 1835.87,2395 1836,2395 1836,2524 v1(1823,2537) ; v1(1822,2606) 1824,2604 1824,2609 1945.54,2730.54 U7.17@2120,2730.54
  Bottom Layer w8: v1@1824,2537 v1@1824,2606
PI4: U1.45 U7.16 | length 870.2
  Top Layer w6: U1.45@1805.12,2084.65 1804,2085.76 1804,2380.1 1824,2400.1 1824,2502 1802,2524 1802,2554 1958.85,2710.85 U7.16@2120,2710.85
PI5: R63.1 U1.46 U7.18 | length 1927.4
  Top Layer w6: U1.46@1789.37,2084.65 1789.37,2382.45 1812,2405.07 1812,2496 1789.37,2518.63 1789.37,2609.37 1930.22,2750.22 U7.18@2120,2750.22 2179.78,2750.22 v1(2215,2715)
  Bottom Layer w6: v1(2215,2715) 2876.06,2715 2965,2803.94 R63.1@2965,2902.5
PI6: R65.1 U1.47 U7.8 | length 1818.6
  Top Layer w6: U1.47@1773.62,2084.65 1773.62,2401.62 v1(1790,2418) ; v1(1965,2555) 1966.63,2553.37 U7.8@2120,2553.37 2208.37,2553.37 v1(2210,2555)
  Bottom Layer w6: v1(1790,2418) 1790,2419 1878,2507 1917,2507 v1(1965,2555) ; v1(2210,2555) 2472,2555 2620,2703 2881.03,2703 3045,2866.97 R65.1@3045,2902.5
PI7: R50.2 U1.48 U7.7 | length 898.6
  Top Layer w6: U1.48@1757.87,2084.65 1757.87,2432.87 v1(1780,2455) ; v1(1906.68,2533.69) U7.7@2120,2533.69 2243.19,2533.69 R50.2@2259.5,2550
  Bottom Layer w6: v1(1780,2455) 1796,2455 1875,2534 1906.37,2534 v1(1906.68,2533.69)
PI8: U1.49 U7.29 | length 1038.4
  Top Layer w6: U7.29@1322.76,2789.59 1595.41,2789.59 1742.13,2642.87 U1.49@1742.13,2084.65
PI9: R66.1 U1.50 U7.30 | length 1366.3
  Top Layer w6: U7.30@1322.76,2769.91 1555.09,2769.91 1726.38,2598.62 U1.50@1726.38,2084.65
  Bottom Layer w6: v1(1686,2640) 1687.53,2640 1950.03,2902.5 R66.1@1955,2902.5
PI10: R70.1 U1.51 U7.31 | length 1448
  Top Layer w6: U7.31@1322.76,2750.22 1514.78,2750.22 1710.63,2554.37 U1.51@1710.63,2084.65
  Bottom Layer w6: v1(1673,2593) 1673,2597.3 1732.24,2656.54 1732.24,2667.74 1935.54,2871.04 2013.54,2871.04 R70.1@2045,2902.5
PI11: U1.52 U7.32 | length 894.8
  Top Layer w6: U7.32@1322.76,2730.54 1484.46,2730.54 1694.88,2520.12 U1.52@1694.88,2084.65
PI12: R71.1 U1.53 U7.41 | length 1133.9
  Top Layer w6: U7.41@1322.76,2553.37 v1@1400,2553.37 ; v1(1400,2560) 1406.63,2553.37 1573.6,2553.37 1679,2447.97 1679,2084.78 U1.53@1679.13,2084.65
  Bottom Layer w6: R71.1@1380,2902.5 1380,2575 1400,2555 1405,2555 v1(1400,2560)
PI13: R72.1 U1.54 U7.42 | length 1169.3
  Top Layer w6: v1(1261,2563) 1290.32,2533.69 U7.42@1322.76,2533.69 1324.07,2535 1575,2535 1663.39,2446.61 U1.54@1663.39,2084.65
  Bottom Layer w6: v1(1261,2563) 1261,2863.5 R72.1@1300,2902.5
PI14: R73.1 U1.55 U7.43 | length 1099
  Top Layer w6: U7.43@1322.76,2514 v1(1539,2514) 1572.97,2514 1647.64,2439.33 U1.55@1647.64,2084.65
  Bottom Layer w6: v1(1539,2514) R73.1@1539,2902.5
PI15: R81.1 U1.56 U7.44 | length 1097
  Top Layer w6: U7.44@1322.76,2494.31 1324.07,2493 v1(1461,2493) 1577,2493 1631.89,2438.11 U1.56@1631.89,2084.65
  Bottom Layer w6: R81.1@1457,2902.5 1461,2898.5 v1(1461,2493)
PJ0: SYS.2 U1.76 | length 1947
  Top Layer w7: SYS.2@219.92,840 325,945.08 v1(325,955) ; v1(1164,1839) 1175.87,1850.87 U1.76@1445.35,1850.87
  Bottom Layer w7: v1(325,955) 348.5,978.5 348.5,1402.59 561.91,1616 1024,1616 1164,1756 v1(1164,1839)
PJ1: NET.2 U1.77 | length 2086.8
  Top Layer w8: NET.2@219.92,665 219.92,719.92 282.5,782.5 282.5,862.5 v1(350,930) ; v1(1203,1829) 1209.12,1835.12 U1.77@1445.35,1835.12
  Bottom Layer w8: v1(350,930) 362,942 362,1397 567.5,1602.5 1029.59,1602.5 1177.5,1750.41 1177.5,1803.5 v1(1203,1829)
PJ2: GPIO.4 U1.78 | length 2501.4
  Top Layer w7: U1.78@1445.35,1819.37 1496.14,1819.37 1529.96,1853.19 1628.58,1853.19 1698.38,1923 v1(1719,1923)
  Bottom Layer w7: v1(1719,1923) 1731.91,1923 1928.91,2120 2033.92,2120 2389.92,2476 2905.23,2476 2987.23,2558 3413,2558 3483,2628 3551,2628 GPIO.4@3594,2671
PJ3: GPIO.3 U1.75 | length 2381.8
  Top Layer w7: U1.75@1445.35,1866.61 1618.61,1866.61 1715,1963 v1(1736,1963)
  Bottom Layer w7: v1(1736,1963) 1753.53,1963 1923.53,2133 2028.54,2133 2384.54,2489 2899.84,2489 2981.84,2571 3394,2571 GPIO.3@3494,2671
PJ4: GPIO.5 U1.79 | length 2366.5
  Top Layer w7: U1.79@1445.35,1803.62 1498.78,1803.62 1535.15,1840 1633.77,1840 1686.77,1893 v1(1708,1893)
  Bottom Layer w7: v1(1708,1893) 1720.3,1893 1934.3,2107 2039.31,2107 2395.31,2463 2910.61,2463 2992.61,2545 3468,2545 GPIO.5@3494,2571
PLL_VD12: C13.2 C14.2 C15.1 FB1.2 U1.117 U1.122 | length 780.8
  Top Layer w6: U1.117@1820.87,1475.35 1820.87,1544.87 v1(1843,1567) ; U1.122@1899.61,1475.35 1899.61,1566.11 v1(1901,1567.5)
  Top Layer w15: v1(1901,1567.5) 1963.56,1567.5 2038.06,1493 2191.42,1493 2205.92,1507.5 2247.5,1507.5 2297,1557 2297,1559 2359.41,1559 FB1.2@2367.5,1550.91
  Bottom Layer w15: v1(1843,1567) C14.2@1901,1567
PLL_VSS: C13.1 C14.1 C15.2 FB3.2 U1.95 | length 1232.9
  Top Layer w10: v1(1365,1538) 1378.65,1551.65 U1.95@1445.35,1551.65
  Top Layer w15: v1(1629,1536) 1634,1536 1658,1560 1658,1600 1688,1630 1860.5,1630 v1(1868,1622.5) ; v1(2227,1540) 2236,1549 2240,1549 2240,1568.78 2285.75,1614.53 C15.2@2295,1614.53 2295.44,1614.09 FB3.2@2367.5,1614.09
  Bottom Layer w15: v1(1365,1538) 1368.5,1534.5 1627.5,1534.5 v1(1629,1536) ; v1(1868,1622.5) C14.1@1901,1622.5 2070.5,1622.5 2153,1540 v1(2227,1540)
RMII0_NRST: R89.2 U9.21 | length 169.2
  Top Layer w10: U9.21@844.16,1401.49 844.16,1439.16 869,1464 869,1550.5 R89.2@876,1557.5
RTC_VD33: BATT.1 C11.1 C12.2 D4.3 Q4.E R30.1 R32.1 U1.35 | length 3733
  Top Layer w8: U1.35@1962.6,2084.65 1962.6,2186.2 C12.2@2037.9,2261.5
  Top Layer w10: Q4.E@3597,659 3606.5,649.5 R32.1@3606.5,593 3611,588.5 R30.1@3611,531.5
  Top Layer w15: v1(2031.79,2330.5) 2031.79,2267.61 C12.2@2037.9,2261.5 ; v1(2835,2550) 2891,2494 2891,2024 3081,1834 3266.53,1834 3269.53,1831 ; D4.3@3218.5,1736.5 3269.53,1787.53 3269.53,1831 ; D4.3@3219.5,1734.5 3262.32,1691.68 3262.32,1215.68 3478,1000 3478,808 v1(3500,786) ; BATT.1@3269.53,1901 3269.53,1831 ; Q4.E@3597,659 v1(3598,660)
  Bottom Layer w15: v1(2031.79,2330.5) 2233.29,2532 2623,2532 2641,2550 v1(2835,2550) ; v1(3500,786) 3598,688 v1(3598,660)
RTC_XIN: C3.2 U1.38 Y2.4 | length 194.1
  Top Layer w8: U1.38@1915.35,2084.65 1915.35,2194.35 v1(1953,2232)
  Bottom Layer w6: Y2.4@1940.72,2205.98 1940.72,2219.72 v1(1953,2232)
RTC_XOUT: C4.2 U1.39 Y2.1 | length 180.2
  Top Layer w8: v1(1893,2231.5) 1899.61,2224.89 U1.39@1899.61,2084.65
  Bottom Layer w6: v1(1893,2231.5) 1893,2218.27 Y2.1@1905.28,2205.98
RXD2: R84.1 U9.11 | length 153.8
  Top Layer w10: U9.11@948.49,1277.47 1085.97,1277.47 R84.1@1097.5,1289
RXDV: R75.1 U9.8 | length 202.1
  Top Layer w10: U9.8@922.9,1212.51 922.9,1192.1 940,1175 R75.1@1097.5,1175
RXN: RJ45.6 U9.6 | length 493.9
  Top Layer w10: RJ45.6@860,792.91 860,873.56 961.44,975 961.44,1083.56 883.53,1161.47 U9.6@883.53,1212.51
RXP: RJ45.3 U9.5 | length 658.4
  Top Layer w10: RJ45.3@710,692.91 710,845 738,873 808,873 905,970 905,1105 863.84,1146.16 U9.5@863.84,1212.51
SDVD33: C36.1 CT1.2 Q1.D R11.1 R12.2 R13.2 R14.1 R15.2 R17.2 R20.2 U2.11 U2.12 | length 1872.2
  Top Layer w12: U2.12@66,1945.18 94.82,1945.18 150,1890 ; U2.11@66,2021.64 118.36,2021.64 150,1990 150,1890 ; CT1.2@179.68,1620.41 C36.1@114.68,1620.41 114.68,1715.18 R11.1@116,1716.5 150,1716.5 ; CT1.2@179.68,1626.53 229.16,1626.53 Q1.D@255.68,1600 ; R12.2@920.5,2203 R13.2@920.5,2142.5 R15.2@920.5,2082 R17.2@920.5,2022.5 R20.2@920.5,1966 889.5,1935 835,1935 710,1810 276.5,1810 R14.1@183,1716.5 181.5,1715 180,1716.5 150,1716.5 ; 150,1716.5 150,1890
SPIHLD/D3: R69.1 U8.7 | length 407.9
  Top Layer w8: R69.1@717.5,2584 1047,2584 1072,2559 U8.7@1115,2559
SPIWP/D2: R67.1 U8.3 | length 105
  Top Layer w8: R67.1@717.5,2527 735.5,2509 U8.3@815,2509
SYSPWREN: D2.1 U1.36 | length 2738.4
  Top Layer w7: U1.36@1946.85,2084.65 1946.85,1947.15 v1(1983,1911) ; v1(3359,1708) 3440,1627 3619,1627 3654,1592 3654,960 D2.1@3596,902
  Bottom Layer w7: v1(1983,1911) 1982,1911 2083,1810 2302,1810 2339,1847 3220,1847 v1(3359,1708)
SYSWKUP: Q5.D R30.2 R35.1 RTC_KEY.2 U1.37 | length 3576.1
  Top Layer w7: U1.37@1931.1,2084.65 1931.1,1918.9 1969,1881 v1(1974,1881) ; v1(3362,1671) 3419,1614 3613.62,1614 3641,1586.62 3641,997 3629,985 v1(3629,978)
  Top Layer w10: Q5.D@3443,581 3463,581 3517,527 3517,505.5 R35.1@3547,475.5 3610,475.5 R30.2@3611,476.5 3611,407 RTC_KEY.2@3596,392
  Bottom Layer w7: v1(1974,1881) 2058,1797 2312,1797 2346,1831 3205,1831 3365,1671 v1(3362,1671) ; RTC_KEY.2@3596,392 3629,425 v1(3629,978)
TXN: RJ45.2 U9.4 | length 536.3
  Top Layer w10: RJ45.2@660,792.91 660,854 706,900 775,900 844.16,969.16 U9.4@844.16,1212.51
TXP: RJ45.1 U9.3 | length 650.7
  Top Layer w10: RJ45.1@610,692.91 605,697.91 605,845 690,930 755,930 784,959 784,1124 824.47,1164.47 U9.3@824.47,1212.51
U1_RXD: COM1.2 R65.2 | length 84.2
  Bottom Layer w8: COM1.2@3041,3040 3041,2961.5 R65.2@3045,2957.5
U1_TXD: COM1.3 R63.2 | length 83.7
  Bottom Layer w8: COM1.3@2962,3040 2962,2960.5 R63.2@2965,2957.5
U4_RXD: COM4.2 R70.2 | length 85.4
  Bottom Layer w8: COM4.2@2038,3040 2038,2964.5 R70.2@2045,2957.5
U4_TXD: COM4.3 R66.2 | length 84.2
  Bottom Layer w8: R66.2@1955,2957.5 1959,2961.5 COM4.3@1959,3040
U7_RXD: COM7.2 R62.2 | length 85
  Bottom Layer w8: COM7.2@2539,3040 2539,2963.5 R62.2@2545,2957.5
U7_TXD: COM7.3 R61.2 | length 84.6
  Bottom Layer w8: COM7.3@2460,3040 2460,2962.5 R61.2@2465,2957.5
U8_CTS: COM8.3 R81.2 | length 83.3
  Bottom Layer w8: COM8.3@1455,3040 1455,2959.5 R81.2@1457,2957.5
U8_RTS: COM8.2 R73.2 | length 84.6
  Bottom Layer w8: COM8.2@1534,3040 1534,2962.5 R73.2@1539,2957.5
U8_RXD: COM8.5 R72.2 | length 83.3
  Bottom Layer w8: COM8.5@1298,3040 1300,3038 R72.2@1300,2957.5
U8_TXD: COM8.4 R71.2 | length 84.2
  Bottom Layer w8: COM8.4@1376,3040 1380,3036 R71.2@1380,2957.5
USB0_DM: R19.2 U1.124 | length 761
  Top Layer w8: U1.124@1931.1,1475.35 1931.1,1414.92 1980.02,1366 2134.2,1366 2215,1285.2 2215,1142.7 2329,1028.7 R19.2@2329,969.5
USB0_DP: R16.2 U1.125 | length 787.2
  Top Layer w8: U1.125@1946.85,1475.35 1946.85,1418.97 1985.53,1380.28 2139.72,1380.28 2229,1291 2229,1148.5 R16.2@2408,969.5
USB0_ID: J1.2 U1.1 | length 1042.8
  Top Layer w6: U1.1@2054.65,1535.91 2097.09,1535.91 2107,1526 v1(2107,1524)
  Bottom Layer w6: J1.2@2101,594 J1.2@2098,594 2041,651 2041,1039 2106,1104 2106,1299.5 2105.5,1300 2105.5,1522.5 v1(2107,1524)
USB0_VSS: C16.2 C17.1 C18.1 FB4.1 U1.123 | length 906.5
  Top Layer w8: U1.123@1915.35,1475.35 1915.35,1408.65 1974,1350 2109,1350 v1(2129,1330) 2107,1330 2087,1310 2087,1270 2067,1250 2011.5,1250 C17.1@1984,1222.5 ; C16.2@2290,1330 FB4.1@2362.5,1330
  Top Layer w12: v1(2288,1328) 2360.5,1328 FB4.1@2362.5,1330
  Top Layer w15: C16.2@2289.5,1330.03 C16.2@2290,1329.53 ; C18.1@2344.5,1394 2362.5,1376 FB4.1@2362.5,1330
  Bottom Layer w12: v1@2129,1332 2284,1332 v1(2288,1328)
USB0DM: R19.1 USBD1.2 USBH1.2 | length 735.6
  Top Layer w15: R19.1@2329,914.5 2334,909.5 USBH1.2@2334,756 2370,720 2370,195.96 USBD1.2@2370.04,195.92
USB0DP: R16.1 USBD1.3 USBH1.3 | length 727.8
  Top Layer w15: USBD1.3@2395.63,195.92 2395.63,738.63 USBH1.3@2413,756 2408,761 R16.1@2408,914.5
USB1_DM: R21.2 U1.118 | length 1210.8
  Top Layer w8: R21.2@1408.5,645 1382,671.5 1382,788.8 1505.2,912 1698,912 1919,1133 1919,1323 1836.61,1405.39 U1.118@1836.61,1475.35
USB1_DP: R22.2 U1.119 | length 1136.6
  Top Layer w8: R22.2@1408.5,704 1408.5,795.5 1511,898 1703.8,898 1935,1129.2 1935,1329 1852.36,1411.64 U1.119@1852.36,1475.35
USB_TO_DC: D1.1 DC.1 SW1.1 | length 940.7
  Bottom Layer w40: D1.1@2467.37,306 2494,306 2659.94,140.06 SW1.1@2721,140.06
  Bottom Layer w50: SW1.1@2721,140.06 2780.06,140.06 2880,240 2880,480 2954.59,554.59 DC.1@3027,554.59
USB_VD33: C16.1 C17.2 C18.2 FB2.1 U1.120 U1.126 | length 879
  Top Layer w6: U1.120@1868.11,1475.35 1868.11,1417.89 1984,1302 C17.2@1984,1277.5
  Top Layer w8: U1.126@1962.6,1475.35 1962.6,1430.02 1998.33,1394.28 2190,1394.28
  Top Layer w10: C16.1@2281.76,1262.24 C16.1@2290,1270.47
  Top Layer w12: 2190,1394.28 2249.28,1394.28 ; C16.1@2281.76,1262.24 2281.76,1266.24 2234.5,1313.5 2234.5,1379.5 2249.28,1394.28 ; C18.2@2289.5,1404 2279.78,1394.28 2249.28,1394.28 ; C16.1@2290,1270.47 2362.03,1270.47 FB2.1@2362.5,1270
VD50: C40.1 C41.2 C42.1 C50.1 C51.1 C53.1 C54.1 C55.1 C56.1 FS1.1 FS2.1 Q2.D R27.1 U4.4 U5.4 U6.4 | length 3725
  Top Layer w15: C41.2@1577,550 C41.2@1584,543 ; U4.4@3089.2,669 3172.2,586 C42.1@3301.47,586
  Top Layer w25: FS2.1@1576,635 1577,634 C41.2@1577,550 ; v1(2507,686) 2616,795 Q2.D@2655,795 2765,795 ; U6.4@2752.6,976.89 2765.47,964.02 C55.1@2765.47,855 2765.47,795.47 2765,795 ; v1@2840.25,765.25 2810.5,795 2765,795 ; R27.1@2850,755.5 2919.69,685.81 C50.1@2945,685.81 3006.81,685.81 C51.1@3013,692 3066.2,692 U4.4@3089.2,669 ; U5.4@2990.8,1470.13 2994.7,1474.03 C54.1@3064,1474.03 C53.1@3145.97,1474.03 ; C53.1@3145,1475 C53.1@3145.97,1474.03 ; v1(3179,1250) 3181,1252 3181,1439 C53.1@3145.97,1474.03
  Bottom Layer w20: v1(1575,589) 1772,392 2227,392 2340,505 FS1.1@2340,601
  Bottom Layer w25: FS1.1@2340,601 2442.47,601 C40.1@2443.47,602 2443.47,629.16 2462.37,648.06 2465.06,648.06 2503,686 v1(2507,686) ; v1(2840,765) 2857,748 3191,748 3257,814 3257,1172 v1(3179,1250)
XIN: C1.2 R1.1 U1.99 Y1.3 | length 375.9
  Top Layer w6: R1.1@1513,1366.5 1537.4,1390.9 ; 1537.4,1391.9 U1.99@1537.4,1475.35
  Top Layer w12: C1.2@1439,1193.5 1457,1193.5 ; Y1.3@1498.67,1188.5 1493.67,1193.5 1457,1193.5 ; R1.1@1513,1366.5 1457,1310.5 1457,1193.5
XOUT: R2.2 U1.100 | length 114.8
  Top Layer w6: 1553.15,1383.35 R2.2@1570,1366.5 ; 1553.15,1384.35 U1.100@1553.15,1475.35
pads on no net: D2.2 D4.2 RJ45.7 SW1.0 SW1.3 U1.129 U1.131 U3.5 U7.1 U7.2 U7.3 U7.4 U7.5 U7.6 U7.10 U7.11 U7.14 U7.15 U7.20 U7.21 U7.22 U7.23 U7.24 U7.25 U7.26 U7.27 U7.28 U7.33 U7.34 U7.35 U7.38 U7.39 U7.40 U7.45 U7.46 U7.47 U7.48 U9.18 U9.19 USBD1.0

## Polygon pours and split planes (outlines as drawn)
no net on Top Layer "NONET_L01_P012" (solid, remove dead copper, pour order 12): 466.87,945 1100,945 1100,334 469.23,334
no net on Top Layer "NONET_L01_P006" (solid, remove dead copper, pour order 6): 2706.51,971.51 2512.76,974.24 2497,990 2497,1108 2512,1123 2707,1123 2722,1108 2722,987
no net on Top Layer "NONET_L01_P004" (solid, remove dead copper, pour order 4): 3004.51,1274.51 2810.76,1277.24 2795,1293 2795,1411 2810,1426 3005,1426 3020,1411 3020,1290
no net on Top Layer "NONET_L01_P002" (solid, remove dead copper, pour order 2): 2898.51,837.49 2901.24,1031.24 2917,1047 3035,1047 3050,1032 3050,837 3035,822 2914,822
no net on Bottom Layer "NONET_L02_P014" (solid, remove dead copper, pour order 14): 468,911 467.96,945 502,945 1100,945 1100,337 468.74,337

## Keep-outs
Keep-Out Layer:
  the board outline again, w10

## Other copper
Bottom Layer:
  text "2017-07-07 QQ: 317451929 / wechat: zp_zyf" at 185,430 h80 r270

## Silkscreen, mask and mechanical layers (free items; w line width, h text height)
Top Overlay:
  text "NUC977-DEMO" at 2275,2340 h60
  text "V1.0" at 2515,2220 h60
Drill Drawing:
  circle w10: c157.4,157 r59.06
  circle w10: c157.4,3288 r59.06
  circle w10: c3518,3288 r59.06
  circle w10: c3518,157.28 r59.06
  lines w10: 450,3445.28 450,3101 3225.59,3101 ; 451,2 451,344 3225.59,344 ; 2093.45,3037.13 2175,3095 ; 2114.49,3076.59 2175,3095 ; 2137.64,3043.97 2175,3095 ; 2169.21,3103.16 2180.79,3086.84 ; 2267.61,2706.74 2282.39,2693.26 ; 2300.66,2757.81 2275,2700 ; 2330.21,2730.85 2275,2700 ; 2359.19,2792.29 2275,2700 ; 2634.21,3433.16 2645.79,3416.84 ; 2677.36,3476.03 2640,3425 ; 2700.51,3443.41 2640,3425 ; 2721.55,3482.87 2640,3425 ; 2865.81,3347.71 2950,3440 ; 2894.79,3409.15 2950,3440 ; 2924.34,3382.19 2950,3440 ; 2942.61,3446.74 2957.39,3433.26 ; 3205.59,-60 3225.59,0 ; 3205.59,404 3225.59,344 ; 3205.59,3041 3225.59,3101 ; 3205.59,3505 3225.59,3445 ; 3215.59,0 3235.59,0 ; 3215.59,344 3235.59,344 ; 3215.59,3101 3235.59,3101 ; 3215.59,3445 3235.59,3445 ; 3225.59,-100 3225.59,0 ; 3225.59,0.41 3225.59,344 ; 3225.59,444 3225.59,344 ; 3225.59,3001 3225.59,3101 ; 3225.59,3545 3225.59,3445 ; 3245.59,-60 3225.59,0 ; 3245.59,404 3225.59,344 ; 3245.59,3041 3225.59,3101 ; 3245.59,3505 3225.59,3445 ; 3225.59,3101 3225.59,3445
  text "length" at 1282,3612 h30
  text "344 (mil)" at 3369.55,3032.08 h60 r90
  text "570.197 (mil)" at 2204.67,2939.52 h60 r35.36
  text "1001.611 (mil)" at 2392.52,2775.43 h60 r47.63
  text "width" at -173,1274 h30 r90
  text "344 (mil)" at 3369.55,-68.92 h60 r90

## Dimensions
3675.59,3569 to 3225.59,3579 on Drill Drawing
0,3595 to 450,3642 on Drill Drawing
157.4,3585 to 0,3585 on Drill Drawing
3675.59,3555 to 3518,3587 on Drill Drawing
-130,3445.28 to -132,3288 on Drill Drawing
-137,157.28 to -137,0 on Drill Drawing
0,3445.28 to 3675.59,3445.28 on Drill Drawing
0,0 to 0,3445.28 on Drill Drawing

## Text inside footprints (layer, text, board x,y; h text height)
BATT: Top Overlay "+" at 3315,1906.95 h30 r270; Top Overlay "-" at 3150,1906.95 h30 r270
BOOT: Top Overlay "3" at 3392,2931 h30 r90; Top Overlay "4" at 3292,2931 h30 r90; Top Overlay "2" at 3287,2681 h30 r90; Top Overlay "1" at 3392,2691 h30 r90
COM0: Top Overlay "1" at 2658,3195 h30; Top Overlay "4" at 2324.5,3195 h30
COM1: Top Overlay "1" at 3160,2925 h30; Top Overlay "4" at 2826.5,2925 h30
COM4: Top Overlay "1" at 2157,2925 h30; Top Overlay "4" at 1823.5,2925 h30
COM5: Top Overlay "1" at 2157,3195 h30; Top Overlay "4" at 1823.5,3195 h30
COM6: Top Overlay "9" at 1237,3205 h30 r90; Top Overlay "1" at 1584,3216 h30 r270
COM7: Top Overlay "1" at 2658,2925 h30; Top Overlay "4" at 2324.5,2925 h30
COM8: Top Overlay "9" at 1237,2935 h30 r90; Top Overlay "1" at 1584,2946 h30 r270
COM10: Top Overlay "9" at 575,3205 h30 r90; Top Overlay "1" at 922,3216 h30 r270
GPIO: Top Overlay "2" at 3578,2869 h30 r270; Top Overlay "1" at 3475,2864 h30 r270; Top Overlay "33" at 3474,1111 h30 r270; Top Overlay "34" at 3574,1111 h30 r270
I2C0: Top Overlay "1" at 3160,3195 h30; Top Overlay "4" at 2826.5,3195 h30
SPI0: Top Overlay "9" at 575,2935 h30 r90; Top Overlay "1" at 922,2946 h30 r270
U3: Mechanical 16 "U17" at 1779.9,659.32 h30
USBH1: Top Overlay "1" at 2215,871 h30 r180; Top Overlay "4" at 2548.5,871 h30 r180